# Altium PCB ERBB_Panel.PcbDoc
Units mil, origin at the board's own origin, x right, y up, seen from the top; angles counter-clockwise.
Board outline 4600 x 7991.65 mil, 2 copper layers (Top, Bottom), stack 60.8 mil thick; 6 components, 0 nets, 10 pads, 0 vias.
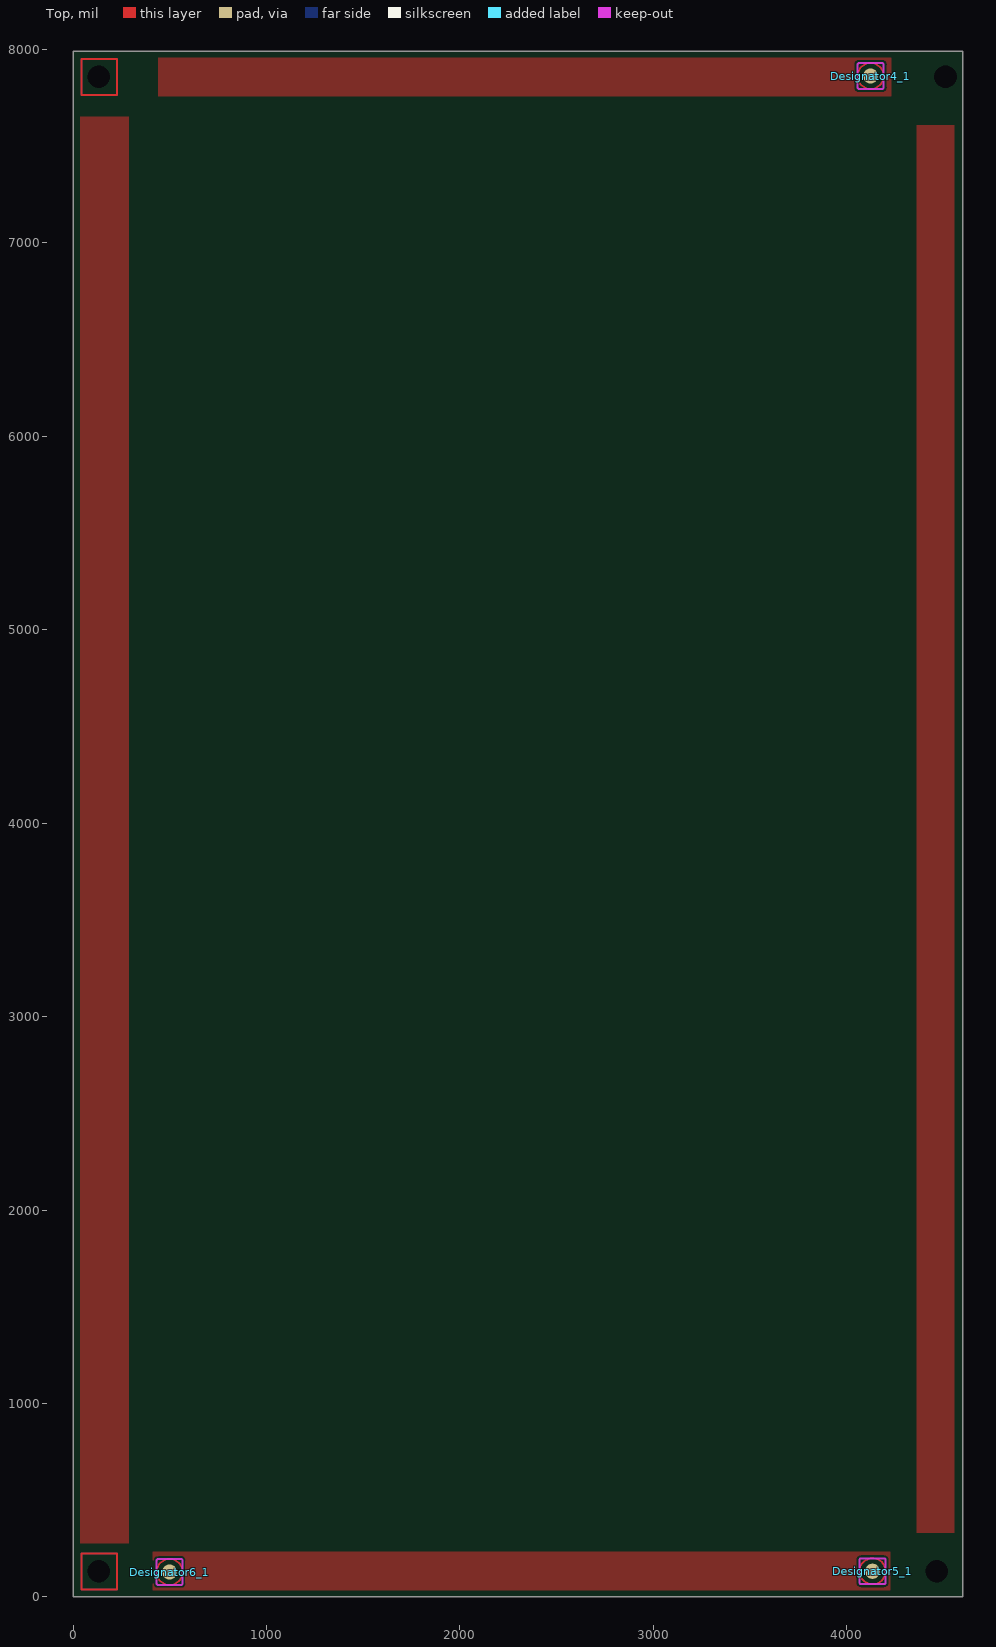
[diagram p0: Top view]
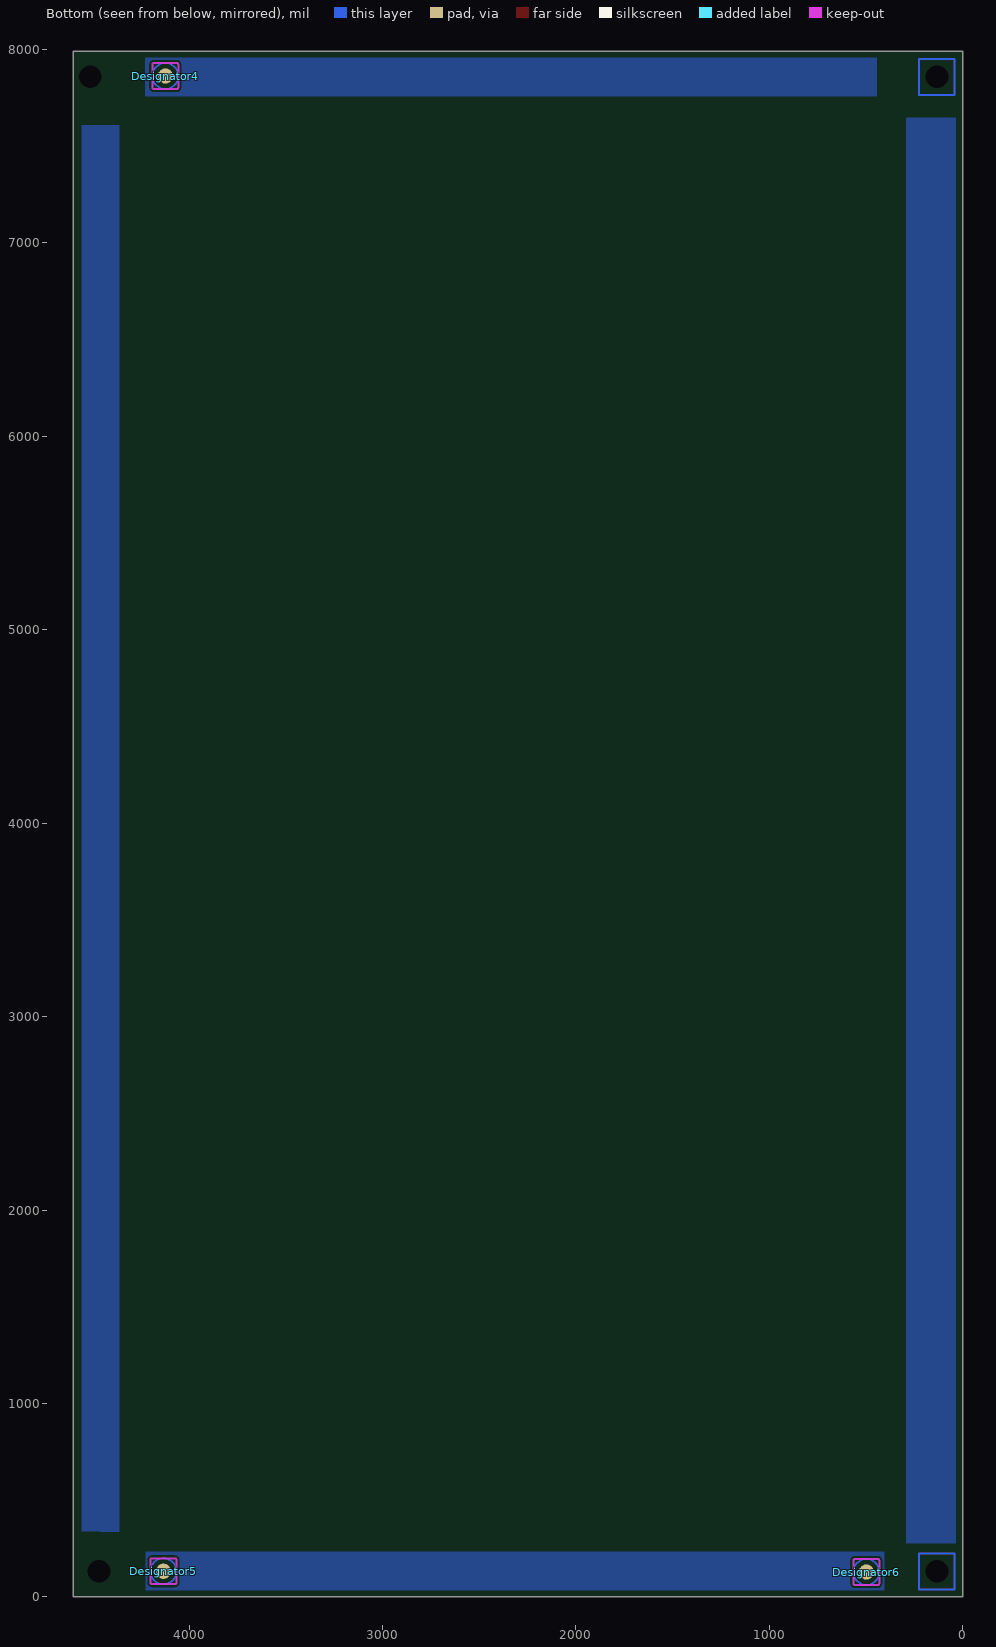
[diagram p1: Bottom view, seen from below]

## Layer stack, top to bottom
Top Solder: solder mask 0.472, Solder Resist, Dk 3.5
Top: signal copper 1.4
Dielectric 1: core 58, FR-4, Dk 4.2
Bottom: signal copper 1.4
Bottom Solder: solder mask 0.472, Solder Resist, Dk 3.5

## Board outline
0,0 0,7991.65 4600,7991.65 4600,0

## Design rules (kind name [scope] priority, off if disabled: settings)
Clearance [All] p1: gap=10 ignorepadtopadclearanceinfootprint=FALSE except(0: Arc-Hole Track-Hole SMDPad-Hole THPad-Hole Via-Hole Fill-Hole Poly-Hole Region-Hole Text-Hole)
PolygonConnect [All] p1: connectstyle=Relief reliefconductorwidth=10 reliefentries=4 polygonreliefangle="90 Angle" airgapwidth=10
RoutingVias [All] p1: holewidth=28 width=50 viastyle="Through Hole" minholewidth=28 minwidth=50 maxholewidth=28 maxwidth=50
SolderMaskExpansion [All] p1: expansion=4
Width [All] p1: maxlimit=10 minlimit=10 preferedwidth=10
30 further rules are at their usual default settings.

## Components (designator, comment, footprint, x,y, rotation, side; value= is the part's Value field where it differs from the comment)
Designator4 "Comment" FIDUCIAL-2X3-PANEL 4122.83,7862.68 r90 bottom
Designator4_1 "Comment" FIDUCIAL-2X3-PANEL 4122.83,7862.68 r90 top
Designator5 "Comment" FIDUCIAL-2X3-PANEL 4132.83,132.83 r90 bottom
Designator5_1 "Comment" FIDUCIAL-2X3-PANEL 4132.83,132.83 r90 top
Designator6 "Comment" FIDUCIAL-2X3-PANEL 498.94,128.94 r90 bottom
Designator6_1 "Comment" FIDUCIAL-2X3-PANEL 498.94,128.94 r90 top

## Footprints (in the part's own frame and the unit in brackets; to place one, negate y for a bottom-side part, rotate by r counter-clockwise, add the part's x,y. Pads: shape width x height; smd on the part's side, far side on the other; paste and mask are expansions set on the pad)
FIDUCIAL-2X3-PANEL [mm]
  rrect100% 2x2 smd paste+0 mask+0.508: 1(0,0)
  Top circle w0.178: c0,0 r1.7
  Keep-Out Layer lines w0.254: -1.5,-1.7 cw(c-1.5,-1.5) -1.7,-1.5 -1.7,1.5 cw(c-1.5,1.5) -1.5,1.7 1.5,1.7 cw(c1.5,1.5) 1.7,1.5 1.7,-1.5 cw(c1.5,-1.5) 1.5,-1.7 -1.5,-1.7
  body extent -1.01,-1.01 1.02,1.01, height 0.02

## Free pads (board coordinates)
  round 0 hole 118.11 unplated paste-3897.64 mask-4.02: 0(132.87,133) 1(4465,133) 2(4510.83,7858.78) 3(132.87,7858.78)

## Nets (pads, with @x,y where several pads share a name; then routed paths per layer and width w, separated by ;. In a path a pad name is that pad's centre, name@x,y a point inside that pad or via, vN(x,y) a via of type N, cw(c..) or ccw(c..) an arc to the next point about the centre after c; other vN are vias at no path point)
pads on no net: Designator4.1 Designator4_1.1 Designator5.1 Designator5_1.1 Designator6.1 Designator6_1.1
copper on no net: | length 2960.6
  Top w10: 43.31,38.39 227.36,38.39 227.36,224.41 43.31,224.41 43.31,38.39 ; 43.31,7764.29 227.36,7764.29 227.36,7950.31 43.31,7950.31 43.31,7764.29
  Bottom w10: 43.31,38.39 227.36,38.39 227.36,224.41 43.31,224.41 43.31,38.39 ; 43.31,7764.29 227.36,7764.29 227.36,7950.31 43.31,7950.31 43.31,7764.29

## Polygon pours and split planes (outlines as drawn)
no net on Bottom "Frame-Copper" (solid, pour order 32): 4555.9,7607 4555.9,334 4551.57,338.33 4362,334 4362,7607
no net on Bottom "Frame-Copper" (solid, pour order 34): 292,7646 292,277.56 37.4,277.56 37.4,7646
no net on Bottom "Frame-Copper" (solid, pour order 22): 445,7758.39 4227,7758.39 4227,7958.19 445,7958.19
no net on Bottom "Frame-Copper" (solid, pour order 28): 407,33.46 4225,33.46 4225,233.27 407,233.27
no net on Top "Frame-Copper" (solid, pour order 21): 441,7758.39 4231,7758.39 4231,7958.19 441,7958.19
no net on Top "Frame-Copper" (solid, pour order 31): 4554.95,7607 4554.95,331 4361.05,331 4361.05,7607
no net on Top "Frame-Copper" (solid, pour order 33): 289,7652 289,277.56 37.4,277.56 37.4,7652
no net on Top "Frame-Copper" (solid, pour order 27): 412,33.46 4225,33.46 4225,233.27 412,233.27

## Other copper
Top:
  text "Top Signal" at 1828.35,9312.36 h60
  text "Layer 1" at 1828.35,9192.36 h60
Bottom:
  text "Bottom Signal" at 2746.97,9313.35 h60
  text "Layer 2" at 2746.97,9193.35 h60

## Silkscreen, mask and mechanical layers (free items; w line width, h text height)
Top Overlay:
  text "Top Silkscreen" at 432.68,8332.52 h60
Bottom Overlay:
  text "Bottom Silkscreen" at 902.68,10007.52 h60
Top Paste:
  text "Top Paste" at 2412.68,8332.52 h60
Top Solder:
  text "Einsy 0.5a" at 2307.68,8717.52 h60
  text "Top Soldermask" at 2307.68,8592.52 h60
Bottom Solder:
  text "Bottom Soldermask" at 3232.68,8592.52 h60
Dimension:
  the board outline again, w10
  text "Panel" at 1384.84,8894.69 h60
Drill Drawing:
  drawing of 230 lines, arcs and shapes, not listed
  text "Drill Drawing" at 1392.68,8612.52 h60
  text "File" at 5602.83,3522.83 h60
  text "Notes:" at 10475,3425 h60
  text "Top Paste" at 6292.83,3402.83 h60
  text "GTP" at 5602.83,3382.83 h60
  text "Layer" at 5883.18,3252.83 h60
  text "Name" at 6293.09,3252.83 h60
  text "Material" at 7222.84,3252.83 h60
  text "Thickness" at 8082.6,3252.83 h60
  text "Constant" at 8732.44,3252.83 h60
  text "Board Layer Stack" at 9302.3,3252.83 h60
  text "Orange Silkscreen" at 10475,3150 h60
  text "1" at 5883.18,3132.83 h60
  text "Top Overlay" at 6293.09,3132.83 h60
  text "GTO" at 5600,3125 h60
  text "GTL" at 5600,3025 h60
  text "Glossy Black Soldermask" at 10475,3025 h60
  text "2" at 5883.18,3012.83 h60
  text "Top Solder" at 6293.09,3012.83 h60
  text "Solder Resist" at 7222.84,3012.83 h60
  text "0.47mil" at 8082.6,3012.83 h60
  text "3.5" at 8732.44,3012.83 h60
  text "G3" at 5600,2900 h60
  text "3" at 5883.18,2892.83 h60
  text "Top" at 6293.09,2892.83 h60
  text "Copper" at 7222.84,2892.83 h60
  text "1.40mil" at 8082.6,2892.83 h60
  text "4" at 5883.18,2772.83 h60
  text "Dielectric 1" at 6293.09,2772.83 h60
  text "FR-4" at 7222.84,2772.83 h60
  text "58.00mil" at 8082.6,2772.83 h60
  text "4.2" at 8732.44,2772.83 h60
  text "GBL" at 5600,2675 h60
  text "5" at 5883.18,2652.83 h60
  text "Bottom" at 6293.09,2652.83 h60
  text "Copper" at 7222.84,2652.83 h60
  text "1.40mil" at 8082.6,2652.83 h60
  text "GBS" at 5600,2550 h60
  text "6" at 5883.18,2532.83 h60
  text "Bottom Solder" at 6293.09,2532.83 h60
  text "Solder Resist" at 7222.84,2532.83 h60
  text "0.47mil" at 8082.6,2532.83 h60
  text "3.5" at 8732.44,2532.83 h60
  text "Glossy Black Soldermask" at 10492.83,2532.83 h60
  text "GBO" at 5600,2425 h60
  text "7" at 5883.18,2412.83 h60
  text "Bottom Overlay" at 6293.09,2412.83 h60
  text "Orange Silkscreen" at 10492.83,2392.83 h60
  text "Symbol" at 5909.15,892.83 h72
  text "Hit Count" at 6415.02,892.83 h72
  text "Finished Hole Size" at 7112.83,892.83 h72
  text "Plated" at 8458.44,892.83 h72
  text "Hole Type" at 8964.31,892.83 h72
  text "4" at 6415.02,742.83 h60
  text "3.000mm (118.11mil)" at 7112.83,742.83 h60
  text "NPTH" at 8458.44,742.83 h60
  text "Round" at 8964.31,742.83 h60
  text "560" at 6415.02,592.83 h60
  text "0.900mm (35.43mil)" at 7112.83,592.83 h60
  text "PTH" at 8458.44,592.83 h60
  text "Round" at 8964.31,592.83 h60
  text "1484" at 6415.02,442.83 h60
  text "0.254mm (10.00mil)" at 7112.83,442.83 h60
  text "PTH" at 8458.44,442.83 h60
  text "Round" at 8964.31,442.83 h60
  text "2048 Total" at 6415.02,292.83 h60
Panel Dimension:
  text "Panel Dimension" at 432.68,8612.52 h60
V-Score:
  lines w10: 0,285.4 4600,285.4 ; 2.95,7687.65 4600,7687.65 ; 377.95,3.94 377.95,7992 ; 2180.12,0 2180.12,7991.65 ; 2479.33,0 2479.33,7991.65 ; 4281.71,0 4281.71,7991.65
  text "V-Score" at 1833.86,9006.1 h60
Route:
  lines w10: 4600,7981 4600,0 0,0 0,7991.65 4600,7991.65
  lines w31: 4169.99,58.87 4170.98,58.87 ; 4290,7700 3319.52,7700 3319.52,7520.87 4289.99,7520.87 4290.98,7520.87 4290.98,7700 ; 368.11,269.5 1025.59,269.5 1025.59,527.37 368.11,527.37 368.11,269.5 ; 368.11,1306.95 368.11,1593.37 1025.59,1593.37 1025.59,1335.5 2188.98,1335.5 2188.98,1327.62 2188.98,1124.87 2187.99,1124.87 1217.52,1124.87 1217.52,1306.95 368.11,1306.95 ; 368.11,2372.95 1217.52,2372.95 1217.52,2190.87 2187.99,2190.87 2188.98,2190.87 2188.98,2393.62 2188.98,2401.5 1025.59,2401.5 1025.59,2659.37 368.11,2659.37 368.11,2372.95 ; 368.11,3438.95 1217.52,3438.95 1217.52,3256.87 2187.99,3256.87 2188.98,3256.87 2188.98,3459.62 2188.98,3467.5 1025.59,3467.5 1025.59,3725.37 368.11,3725.37 368.11,3438.95 ; 368.11,4504.95 1217.52,4504.95 1217.52,4322.87 2187.99,4322.87 2188.98,4322.87 2188.98,4525.62 2188.98,4533.5 1025.59,4533.5 1025.59,4791.37 368.11,4791.37 368.11,4504.95 ; 368.11,5570.95 1217.52,5570.95 1217.52,5388.87 2187.99,5388.87 2188.98,5388.87 2188.98,5591.62 2188.98,5599.5 1025.59,5599.5 1025.59,5857.37 368.11,5857.37 368.11,5570.95 ; 368.11,6636.95 1217.52,6636.95 1217.52,6454.87 2187.99,6454.87 2188.98,6454.87 2188.98,6657.62 2188.98,6665.5 1025.59,6665.5 1025.59,6923.37 368.11,6923.37 368.11,6636.95 ; 1217.52,7520.87 1217.52,7700 2188.98,7700 2188.98,7520.87 2187.99,7520.87 1217.52,7520.87 ; 2470.11,269.5 3127.59,269.5 3127.59,527.37 2470.11,527.37 2470.11,269.5 ; 2470.11,1306.95 3319.52,1306.95 3319.52,1124.87 4289.99,1124.87 4290.98,1124.87 4290.98,1327.62 4290.98,1335.5 3127.59,1335.5 3127.59,1593.37 2470.11,1593.37 2470.11,1306.95 ; 2470.11,2372.95 3319.52,2372.95 3319.52,2190.87 4289.99,2190.87 4290.98,2190.87 4290.98,2393.62 4290.98,2401.5 3127.59,2401.5 3127.59,2659.37 2470.11,2659.37 2470.11,2372.95 ; 2470.11,3438.95 3319.52,3438.95 3319.52,3256.87 4289.99,3256.87 4290.98,3256.87 4290.98,3459.62 4290.98,3467.5 3127.59,3467.5 3127.59,3725.37 2470.11,3725.37 2470.11,3438.95 ; 2470.11,4504.95 3319.52,4504.95 3319.52,4322.87 4289.99,4322.87 4290.98,4322.87 4290.98,4525.62 4290.98,4533.5 3127.59,4533.5 3127.59,4791.37 2470.11,4791.37 2470.11,4504.95 ; 2470.11,5570.95 3319.52,5570.95 3319.52,5388.87 4289.99,5388.87 4290.98,5388.87 4290.98,5591.62 4290.98,5599.5 3127.59,5599.5 3127.59,5857.37 2470.11,5857.37 2470.11,5570.95 ; 2470.11,6636.95 3319.52,6636.95 3319.52,6454.87 4289.99,6454.87 4290.98,6454.87 4290.98,6657.62 4290.98,6665.5 3127.59,6665.5 3127.59,6923.37 2470.11,6923.37 2470.11,6636.95
  text "Panel Outline (Route)" at 2665.55,9035.63 h60

## Dimensions
0,0 to 4600,0 on Bot Courtyard
0,0 to 0,7991.65 on Bot Courtyard

## Panel: embedded boards
"..\ERBB.PcbDoc" at 4281.5,285.3, 2 rows x 7 columns, spacing 2102 x 1066, rotation 90